# Altium PCB Teensy4-CANTool-Rev3.PcbDoc
Units mil, origin at the board's own origin, x right, y up, seen from the top; angles counter-clockwise.
Board outline 1209.64 x 3442.04 mil, 2 copper layers (Top Layer, Bottom Layer); 29 components, 48 nets, 173 pads, 56 vias.
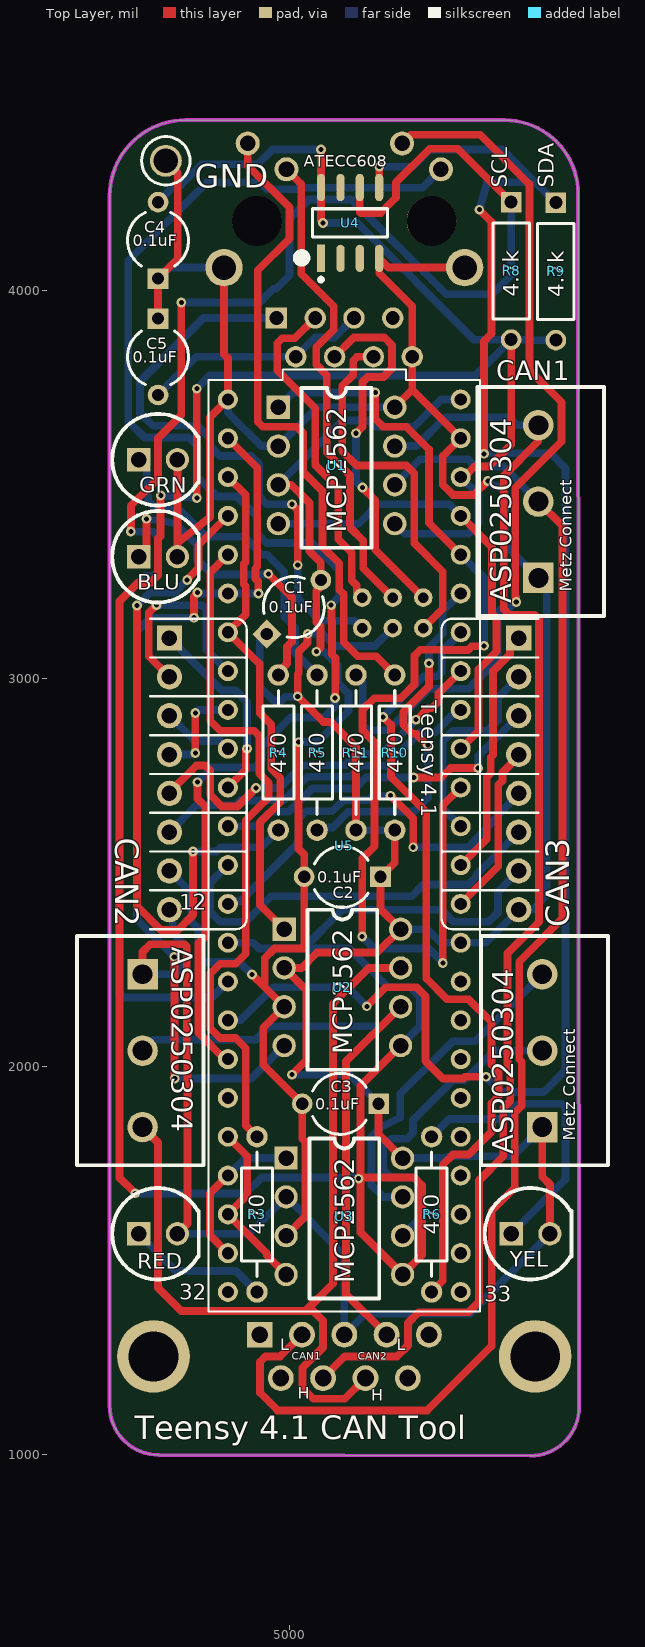
[diagram p0: Top Layer view]
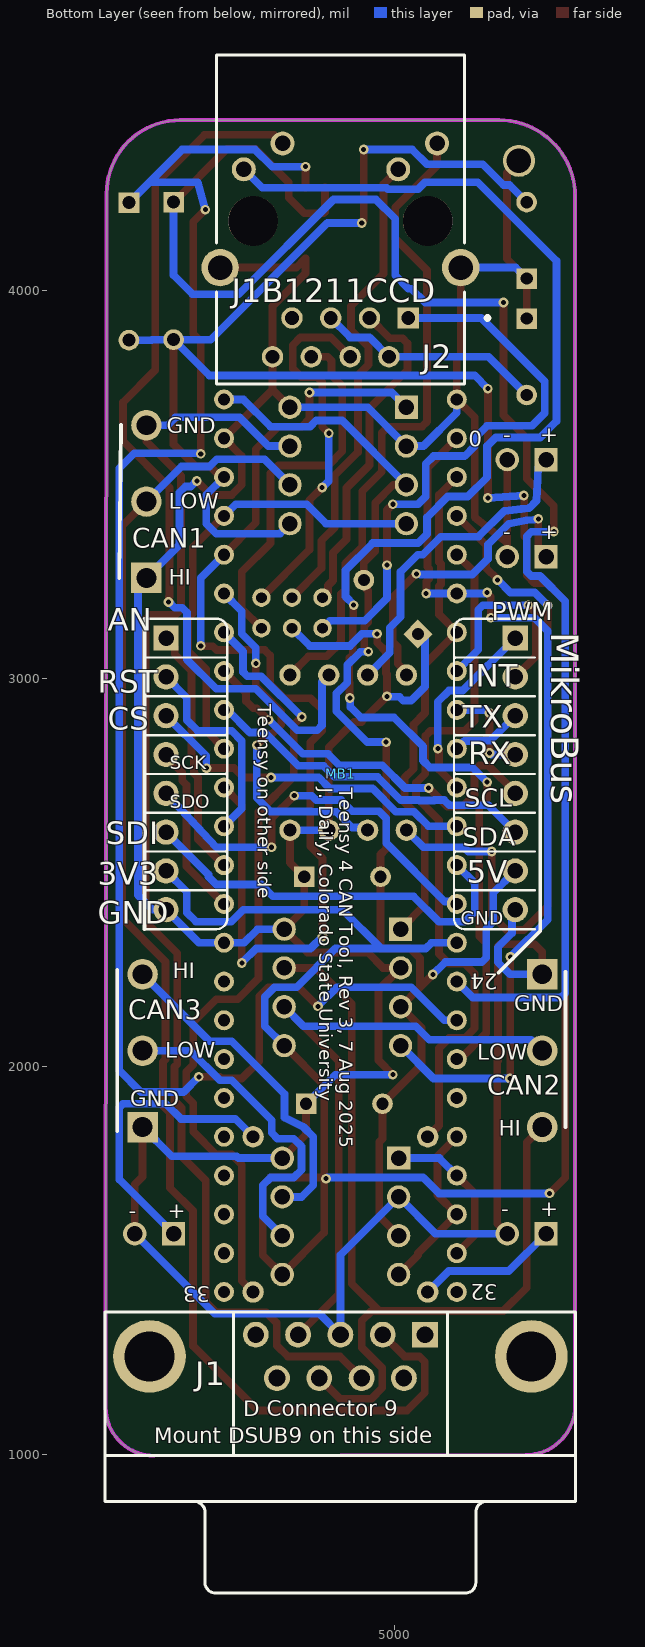
[diagram p1: Bottom Layer view, seen from below]

## Layer stack, top to bottom
Top Solder: solder mask 0.4, Solder Resist, Dk 3.5
Top Layer: signal copper 1.4
Dielectric 1: dielectric 12.6, FR-4, Dk 4.8
Bottom Layer: signal copper 1.4
Bottom Solder: solder mask 0.4, Solder Resist, Dk 3.5

## Board outline
4535.31,1126.44 ccw(c4661.88,1126.44) 4661.88,999.88 5620.25,997.96 ccw(c5620.25,1122.67) 5744.95,1122.67 5742.54,4250.4 ccw(c5553.15,4250.4) 5553.15,4439.79 4731.03,4440 ccw(c4731.03,4244.28) 4535.31,4244.28

## Design rules (kind name [scope] priority, off if disabled: settings)
Clearance [All] p1: gap=10 ignorepadtopadclearanceinfootprint=FALSE except(0: Arc-Hole Track-Hole SMDPad-Hole THPad-Hole Via-Hole Fill-Hole Poly-Hole Region-Hole Text-Hole)
PolygonConnect [All] p1: connectstyle=Relief reliefconductorwidth=10 reliefentries=4 polygonreliefangle="90 Angle" airgapwidth=10
RoutingVias [All] p1: holewidth=13 width=25 viastyle="Through Hole" minholewidth=13 minwidth=20 maxholewidth=28 maxwidth=50
SolderMaskExpansion [All] p1: expansion=4 istentingtop=FALSE
SupplyNets "Schematic Supply Nets_41" [InNet('ETH RX-')] p1: voltage=0.000
SupplyNets "Schematic Supply Nets_40" [InNet('ETH TX-')] p2: voltage=0.000
SupplyNets "Schematic Supply Nets_39" [InNet('ETH GREEN')] p3: voltage=0.000
SupplyNets "Schematic Supply Nets_38" [InNet('ETH TX+')] p4: voltage=0.000
SupplyNets "Schematic Supply Nets_37" [InNet('ETH YELLOW')] p5: voltage=0.000
SupplyNets "Schematic Supply Nets_36" [InNet('ETH RX+')] p6: voltage=0.000
SupplyNets "Schematic Supply Nets_34" [InNet('INT')] p7: voltage=0.000
SupplyNets "Schematic Supply Nets_33" [InNet('CS')] p8: voltage=0.000
SupplyNets "Schematic Supply Nets_32" [InNet('SCL')] p9: voltage=0.000
SupplyNets "Schematic Supply Nets_31" [InNet('CANTX2')] p10: voltage=0.000
SupplyNets "Schematic Supply Nets_30" [InNet('3V3')] p11: voltage=0.000
SupplyNets "Schematic Supply Nets_29" [InNet('PWM')] p12: voltage=0.000
SupplyNets "Schematic Supply Nets_28" [InNet('CANRX3')] p13: voltage=0.000
SupplyNets "Schematic Supply Nets_27" [InNet('MISO')] p14: voltage=0.000
SupplyNets "Schematic Supply Nets_26" [InNet('CANH1')] p15: voltage=0.000
SupplyNets "Schematic Supply Nets_25" [InNet('RST')] p16: voltage=0.000
SupplyNets "Schematic Supply Nets_24" [InNet('SCL2')] p17: voltage=0.000
SupplyNets "Schematic Supply Nets_23" [InNet('RX8')] p18: voltage=0.000
SupplyNets "Schematic Supply Nets_22" [InNet('GND')] p19: voltage=0.000
SupplyNets "Schematic Supply Nets_21" [InNet('RX2')] p20: voltage=0.000
SupplyNets "Schematic Supply Nets_20" [InNet('CANTX1')] p21: voltage=0.000
SupplyNets "Schematic Supply Nets_19" [InNet('5V')] p22: voltage=0.000
SupplyNets "Schematic Supply Nets_18" [InNet('CANH3')] p23: voltage=0.000
SupplyNets "Schematic Supply Nets_17" [InNet('Green')] p24: voltage=0.000
SupplyNets "Schematic Supply Nets_16" [InNet('CANRX2')] p25: voltage=0.000
SupplyNets "Schematic Supply Nets_15" [InNet('Blue')] p26: voltage=0.000
SupplyNets "Schematic Supply Nets_14" [InNet('TX2')] p27: voltage=0.000
SupplyNets "Schematic Supply Nets_13" [InNet('SDA')] p28: voltage=0.000
SupplyNets "Schematic Supply Nets_12" [InNet('SCK')] p29: voltage=0.000
SupplyNets "Schematic Supply Nets_11" [InNet('TX8')] p30: voltage=0.000
SupplyNets "Schematic Supply Nets_10" [InNet('CANL3')] p31: voltage=0.000
SupplyNets "Schematic Supply Nets_9" [InNet('MOSI')] p32: voltage=0.000
SupplyNets "Schematic Supply Nets_8" [InNet('CANRX1')] p33: voltage=0.000
SupplyNets "Schematic Supply Nets_7" [InNet('CANH2')] p34: voltage=0.000
SupplyNets "Schematic Supply Nets_6" [InNet('CANL2')] p35: voltage=0.000
SupplyNets "Schematic Supply Nets_5" [InNet('SDA2')] p36: voltage=0.000
SupplyNets "Schematic Supply Nets_4" [InNet('CANL1')] p37: voltage=0.000
SupplyNets "Schematic Supply Nets_3" [InNet('Yellow')] p38: voltage=0.000
SupplyNets "Schematic Supply Nets_2" [InNet('CANTX3')] p39: voltage=0.000
SupplyNets "Schematic Supply Nets_1" [InNet('Red')] p40: voltage=0.000
SupplyNets "Schematic Supply Nets" [InNet('AN')] p41: voltage=0.000
Width [All] p1: maxlimit=50 minlimit=10 preferedwidth=20 minimp=50.000000 maximp=50.000000 favimp=50.000000
30 further rules are at their usual default settings.

## Components (designator, comment, footprint, x,y, rotation, side; value= is the part's Value field where it differs from the comment)
BLU "LED" "LED - 5mm Through Hole" 4610,3315 r180 top
C1 "0.1uF" CAPR5-4X5 5010,3185 r45 top
C2 "0.1uF" CAPR5-4X5 5135,2490 r180 top
C3 "0.1uF" CAPR5-4X5 5130,1905 r180 top
C4 "0.1uF" CAPR5-4X5 4660,4130 r90 top
C5 "0.1uF" CAPR5-4X5 4660,3830 r270 top
CAN1 "Header 3" "PCB TERMINAL BLOCK - 3" 5640,3260 r90 top
CAN2 "Header 3" "PCB TERMINAL BLOCK - 3" 4620,2238.7 r270 top
CAN3 "Header 3" "PCB Terminal Block - 3" 5650,1845 r90 top
GND "5010" KSTN-5010_V 4680,4335 r90 top
GRN "LED" "LED - 5mm Through Hole" 4610,3565 r180 top
J1 "D Connector 9" DSUB1.385-2H9 5140,880 r0 bottom
J2 "J1B1211CCD" FP-J1B1211CCD-MFG 5140,4183.94 r0 bottom locked
MB1 "mikroBUS" "mikroBUS - Midi" 5639.46,2255 r180 bottom locked
R3 "470" AXIAL-0.4 4915,1620 r90 top
R4 "470" AXIAL-0.4 4970,2810 r270 top
R5 "470" AXIAL-0.4 5070,2810 r270 top
R6 "470" AXIAL-0.4 5365,1620 r270 top
R8 "4.7k" RESA60-630X240 5570,4051.18 r270 top
R9 "4.7k" RESA60-630X240 5685,4050 r270 top
R10 "470" AXIAL-0.4 5270,2810 r90 top
R11 "470" axial-0.4 5170,2810 r90 top
RED "LED" "LED - 5mm Through Hole" 4610,1570 r180 top
U1 "MCP2562" DIP8 4970,3700 r0 top
U2 "MCP2562" DIP8 4985,2355 r0 top
U3 "MCP2562" DIP8 4990,1765 r0 top
U4 "ATECC608" FP-C04-057-SWB-IPC_C 5155,4175 r90 top
U5 "TEENSY41" MODULE_DEV-16771 5140,2570 r270 top locked
YEL "LED" "LED - 5mm Through Hole" 5570,1570 r180 top

## Footprints (in the part's own frame and the unit in brackets; to place one, negate y for a bottom-side part, rotate by r counter-clockwise, add the part's x,y. Pads: shape width x height; smd on the part's side, far side on the other; paste and mask are expansions set on the pad)
AXIAL-0.4 [mm] "Axial Device, Thru-Hole; 2 Leads; 0.4 in Pin Spacing"
  round 1.4 hole 0.85: 1(-5.08,0) 2(5.08,0)
  silkscreen extent -4.06,-1.02 4.06,1.02
axial-0.4 [mm] "Axial Device, Thru-Hole; 2 Leads; 0.4 in Pin Spacing"
  round 1.4 hole 0.85: 1(-5.08,0) 2(5.08,0)
  silkscreen extent -4.06,-1.02 4.06,1.02
CAPR5-4X5 [mm] "Capacitor; 2 Leads"
  rect 1.35x1.35 hole 0.8: 1(-2.5,0)
  round 1.35 hole 0.8: 2(2.5,0)
  silkscreen extent -1.69,-2 1.82,2
DIP8 [mil]
  rect 60x60 hole 40: 1(0,0)
  round 60 hole 40: 2(0,-100) 3(0,-200) 4(0,-300) 5(300,-300) 6(300,-200) 7(300,-100) 8(300,0)
  silkscreen extent 60,-362 240,50
DSUB1.385-2H9 [mm] "Connector; D Subminiature; 9 Position; Right Angle; Pitch 1.385 mm"
  rect 1.69x1.69 hole 1.09: 1(-5.54,-10.92)
  round 1.69 hole 1.09: 2(-2.77,-10.92) 3(0,-10.92) 4(2.77,-10.92) 5(5.54,-10.92) 6(-4.155,-8.08) 7(-1.385,-8.08) 8(1.385,-8.08) 9(4.155,-8.08)
  round 4.76 hole 3.26: 10(-12.495,-9.5) 11(12.495,-9.5)
  silkscreen extent -15.4,-12.4 15.4,6
FP-C04-057-SWB-IPC_C [mil]
  rect 69.96x21.34 smd paste+0 mask+0: 1(-91.24,75)
  rrect100% 69.96x21.34 smd paste+0 mask+0: 2(-91.24,25) 3(-91.24,-25) 4(-91.24,-75) 5(91.24,-75) 6(91.24,-25) 7(91.24,25) 8(91.24,75)
  silkscreen extent -151,-96 37,96, body extent -118,-96 118,96, height 69
FP-J1B1211CCD-MFG [mm]
  rect 1.4x1.4 hole 0.9 paste-2539.97 mask+0: 1(-4.445,6.45)
  round 1.4 hole 0.9 paste-2539.97 mask+0: 2(-3.175,8.99) 3(-1.905,6.45) 4(-0.635,8.99) 5(0.635,6.45) 6(1.905,8.99) 7(3.175,6.45) 8(4.445,8.99)
  round 1.57 hole 1.02 paste-2539.97 mask+0: 9(-6.325,-4.98) 10(-3.785,-3.28) 11(3.785,-4.98) 12(6.325,-3.28)
  round 2.45 hole 1.6 paste-2539.97 mask+0: 13(-7.875,3.15) 14(7.875,3.15)
  round 3.25 hole 3.25 unplated paste-2539.97 mask+0: ""(-5.715,0.1) ""(5.715,0.1)
  silkscreen extent -9.75,-10.78 8.13,10.78, body extent -9.93,-10.65 9.93,10.65, height 15.53
KSTN-5010_V [mm] "Test Point, Dia 3.17mm"
  round 2.1 hole 1.6: 1(0,0)
  silkscreen extent -1.58,-1.59 1.58,1.59, body extent -1.59,-1.59 1.59,1.59, height 8.13
"LED - 5mm Through Hole" [mil] "Vishay TLCS510 Ultrabright LED, Ø 5 mm Untinted Non-Diffused Package"
  rect 60x60 hole 40: 1(0,0)
  round 60 hole 40: 2(-100,0)
  silkscreen extent -155,-118 68,118
"mikroBUS - Midi" [mil]
  rect 65x65 hole 40: 1(50,850) 16(950,850)
  round 65 hole 40: 2(50,750) 3(50,650) 4(50,550) 5(50,450) 6(50,350) 7(50,250) 8(50,150) 9(950,150) 10(950,250) 11(950,350) 12(950,450) 13(950,550) 14(950,650) 15(950,750)
  silkscreen extent 0,100 1000,900, body extent -5,100 1010,900, height 82
MODULE_DEV-16771 [mm]
  round 1.308 hole 0.8: 0(-26.67,-7.62) 1(-24.13,-7.62) 2(-21.59,-7.62) 3(-19.05,-7.62) 3.3V_1(6.35,-7.62) 3.3V_2(-24.13,7.62) 4(-16.51,-7.62) 5(-13.97,-7.62) 6(-11.43,-7.62) 7(-8.89,-7.62) 8(-6.35,-7.62) 9(-3.81,-7.62) 10(-1.27,-7.62) 11(1.27,-7.62) 12(3.81,-7.62) 13(3.81,7.62) 14(1.27,7.62) 15(-1.27,7.62) 16(-3.81,7.62) 17(-6.35,7.62) 18(-8.89,7.62) 19(-11.43,7.62) 20(-13.97,7.62) 21(-16.51,7.62) 22(-19.05,7.62) 23(-21.59,7.62) 24(8.89,-7.62) 25(11.43,-7.62) 26(13.97,-7.62) 27(16.51,-7.62) 28(19.05,-7.62) 29(21.59,-7.62) 30(24.13,-7.62) 31(26.67,-7.62) 32(29.21,-7.62) 33(29.21,7.62) 34(26.67,7.62) 35(24.13,7.62) 36(21.59,7.62) 37(19.05,7.62) 38(16.51,7.62) 39(13.97,7.62) 40(11.43,7.62) 41(8.89,7.62) GND1(-29.21,-7.62) GND2(6.35,7.62) GND3(-26.67,7.62) VIN(-29.21,7.62)
  round 1.208 hole 0.7: GND5(-14.24,3.17) LED(-16.24,3.17) R+(-16.24,5.17) R-(-14.24,5.17) T+(-14.24,1.17) T-(-16.24,1.17)
  silkscreen extent -31.18,-9.5 30.48,8.89
"PCB TERMINAL BLOCK - 3" [mm] "3 Position Wire to Board Terminal Block Horizontal with Board 0.197\" (5.00mm) Through Hole"
  rect 2x2 hole 1.3: 1(0,0)
  round 2 hole 1.3: 2(5,0) 3(10,0)
  silkscreen extent -2.5,-4.3 12.5,4
"PCB Terminal Block - 3" [mm] "3 Position Wire to Board Terminal Block Horizontal with Board 0.197\" (5.00mm) Through Hole"
  rect 2x2 hole 1.3: 1(0,0)
  round 2 hole 1.3: 2(5,0) 3(10,0)
  silkscreen extent -2.5,-4.3 12.5,4
RESA60-630X240 [mm] "Axial Resistor, 2-Leads, Dia 2.4mm, Body Length 6.3mm"
  rect 1.35x1.35 hole 0.85: 1(-4.5,0)
  round 1.35 hole 0.85: 2(4.5,0)
  silkscreen extent -3.15,-1.2 3.15,1.2, body extent -3.15,-1.2 3.15,1.2, height 2.4

## Part data
BLU: "Blue 470nm LED Indication - Discrete 3.2V Radial", Manufacturer="Würth Elektronik", PartNumber=151051BS04000, Supplier Part Number 1=732-5015-ND, Supplier 1=Digi-Key
C1 C2 C3 C4 C5: library part Cap, "0.1µF ±10% 50V Ceramic Capacitor X7R 0603 (1608 Metric)", Manufacturer="Vishay Beyschlag/Draloric/BC Components", PartNumber=K104K15X7RF53H5, Supplier Part Number 1=BC3323-ND, Supplier 1=Digi-Key
CAN1 CAN2 CAN3: "Header, 3-Pin", Manufacturer="Phoenix Contact", PartNumber=1935174, Supplier Part Number 1=277-1578-ND, Supplier 1=Digi-Key
GND: library part CMP-002-00086-1, "Interconnection Device", Connector Type="Interconnection Device", RoHS Compliant=Yes
GRN: "Green 572nm LED Indication - Discrete 2.1V Radial", Manufacturer="Würth Elektronik", PartNumber=151051VS04000, Supplier Part Number 1=732-5017-ND, Supplier 1=Digi-Key
J1: "CONN D-SUB PLUG 9POS R/A SLDR", Manufacturer="Assmann WSW Components", PartNumber="A-DS 09 A/KG-T2S", Supplier Part Number 1=AE10968-ND, Supplier 1=Digi-Key
J2: library part CMP-240752-000001-1, "CONN JACK 1PORT 100 BASE-T PCB", Color=Green, Max Operating Temperature=85°C, Min Operating Temperature=-40°C, Connector Type=RJ45, Contact Material=Brass, Contact Plating=Gold, Direction=Down, Housing Material=Thermoplastic, Mount="Through Hole", Number of Cores per Jack=4, Number of Ports=1, Number of Rows=1, Packaging=Bulk, Series=-, Shielding=Shielded, Termination=Solder
MB1: library part "mikroBUS compatible add-on board", "mikroBUS compatible add-on board"
R3 R4 R5 R6 R10 R11: library part Res1, "470 Ohms ±5% 0.25W, 1/4W Through Hole Resistor Axial Carbon Film", Manufacturer=YAGEO, PartNumber=CFR-25JB-52-470R, Supplier Part Number 1=470QBK-ND, Supplier 1=Digi-Key
R8 R9: library part CMP-1659-00063-1, "Axial Resistor, 47.5 KOhm, +/- 1%, 0.25 W, -55 to 155 degC, 2-Pin THD, RoHS, Bulk", Case Code (Metric)=2520, Case\Package=1008, Current Rating="1.3 A", Max Operating Temperature="125 degC", Min Operating Temperature="-55 degC", Package Quantity=3000, Tolerance=20%, ComponentLink1Description="Manufacturer URL", ComponentLink1URL=http://www.yageo.com/, ComponentLink2Description=Datasheet, ComponentLink2URL=http://www.yageo.com/documents/recent/Yageo%20LR_MFR_2013.pdf, DatasheetVersion=Apr-13, Height="1.2 mm", Length="2.5 mm", Mount="Surface Mount", PackageDescription="2-Pin Axial Lead, Dia 2.4 mm, Body Length 6.3 mm", PackageReference=MFR-25, Packaging="Tape and Reel", Radiation Hardening=No, RoHSCompliant=true, Shielding=Shielded, Width="2 mm"
RED: "Red 645nm LED Indication - Discrete 2.1V Radial", Manufacturer="Würth Elektronik", PartNumber=151051RS11000, Supplier Part Number 1=732-5016-ND, Supplier 1=Digi-Key
U1 U2 U3: library part MCP2551, "1/1 Transceiver CANbus 8-PDIP", Manufacturer="Microchip Technology", PartNumber=MCP2562FD-E/P, Supplier Part Number 1=MCP2562FD-E/P-ND, Supplier 1=Digi-Key
U4: library part CMP-06279-000039-1, "IC AUTHENTICATION CHIP"
U5: library part CMP-105-000000-6, "PJRC Teensy 4.1 Development Board", Design Item ID="Teensy 4.1"
YEL: "Yellow 590nm LED Indication - Discrete 2V Radial", Manufacturer="Würth Elektronik", PartNumber=151051YS04000, Supplier Part Number 1=732-5018-ND, Supplier 1=Digi-Key

## Via types
v1: diameter 25, hole 13, Top Layer to Bottom Layer, 56 vias

## Nets (pads, with @x,y where several pads share a name; then routed paths per layer and width w, separated by ;. In a path a pad name is that pad's centre, name@x,y a point inside that pad or via, vN(x,y) a via of type N, cw(c..) or ccw(c..) an arc to the next point about the centre after c; other vN are vias at no path point)
3V3: C4.2 MB1.7 R8.2 R9.2 U1.5 U2.5 U3.5 U4.8 U5.3.3V_1 U5.3.3V_2 | length 8407.2
  Top Layer w20: v1(4601,1674) 4560.63,1714.37 4560.63,3200 4607.63,3247 4640,3247 4660,3267 4660,3361.48 4666.27,3367.74 4666.27,3471.59 v1(4667.18,3472.5) ; v1(4760,3466.33) v1(4760,3748) ; v1(5080,4364) 5080,4181.35 5085,4176.35 v1(5085,4175) ; v1(5177,1712) 5180,1715 v1@5181.57,1715 ; U2.5 5181.57,1951.57 v1@5181.57,1715 ; U5.3.3V_2 5448.52,3520 5476.02,3547.5 5513.46,3547.5 5570,3604.04 R8.2 ; v1@5181.57,1715 5320,1715 5340,1695 5340,1515 U3.5 5181.57,1573.43 v1@5181.57,1715
  Bottom Layer w20: v1(4601,1674) 4886,1674 4927,1715 5174,1715 v1(5177,1712) ; C4.2 4704.57,4273 4720,4273 4773,4326 4917,4326 4955,4364 v1(5080,4364) ; v1(4667.18,3472.5) v1(4760,3466.33) ; v1(4760,3748) 4794,3782 5477.98,3782 R8.2 ; U5.3.3V_1 4905,2320 4920,2305 5035,2305 ; v1(5085,4175) 5173.2,4175 5474.18,3874.02 R8.2 ; U1.5 5296,3374 5460,3374 5486,3400 5486,3474 U5.3.3V_2 ; U2.5 5335,2105 5335,2180 5310,2205 5253,2205 5153,2305 5035,2305 ; MB1.7 5536,2451.54 5536,2398 5512,2374 5421.3,2374 5390.3,2405 5135,2405 5035,2305 ; R9.2 5627.18,3872.83 5626,3874.02 R8.2
5V: C1.2 C2.2 C3.2 MB1.10 U1.3 U2.3 U3.3 U5.VIN | length 3374.5
  Top Layer w20: v1(4902,2238) 4935,2205 ; U1.3 5003.55,3500 5050.3,3453.26 5050.3,3329.3 5079.6,3300 C1.2 5073.26,3248.26 5073.26,3231.56 5068,3226.31 5068,3146.23 5078.5,3135.73 5078.5,3080.5 v1(5068,3070) ; U3.3 5040,1615 5040,1806.57 5031.57,1815 C3.2 4931,2005.57 4931,2101 U2.3 4935,2205 ; v1(5022,2837) 5022,2562 5036.57,2547.43 C2.2 5036.57,2305 4960,2305 4935,2280 4935,2205
  Bottom Layer w20: MB1.10 4746,2448.46 4746,2374.21 4764.25,2355.96 4764.25,2281.72 4775.97,2270 4870,2270 v1(4902,2238) ; U1.3 5136.08,3666.08 5202.27,3666.08 5218.35,3650 5320,3650 5390,3720 U5.VIN ; v1(5022,2837) 5071,2837 5150.5,2916.5 5150.5,2962.24 5122.44,2990.3 5122.44,3035.56 5088,3070 v1(5068,3070)
AN: MB1.1 U5.14 | length 646.9
  Top Layer w20: U5.14 5506.96,2586.96 5506.96,2746 5517.5,2756.54 5517.5,2798.04 5523.5,2804.04 5523.5,3020.11 5566.96,3063.57 5566.96,3082.5 MB1.1
Blue: R4.2 U5.2 | length 1731.7
  Top Layer w20: v1(4606,3189) 4606,2414.21 4667.71,2352.5 4711.21,2352.5 4750,2391.29 v1(4750,2555) ; v1(4735,3255) 4735,3256.35 4764,3285.35 4764,3344 U5.2
  Bottom Layer w20: v1(4606,3189) 4639.5,3222.5 4702.5,3222.5 v1(4735,3255) ; v1(4750,2555) 4810.3,2555 4821.05,2565.75 4925.75,2565.75 R4.2
CANH1: CAN1.3 J1.7 U1.7 | length 3367.6
  Top Layer w20: J1.7 5141.36,1254 5276,1254 5304,1282 5304,1340 5332,1368 5460,1368 5487,1395 5487,1707.15 5549.5,1769.65 5549.5,1893.95 5567.5,1911.95 5567.5,2000.23 5560.63,2007.1 5560.63,2292.63 5642,2374 5642,3153.5 5630,3165.5 5565.13,3165.5 5550.63,3180 5550.63,3522.9 5640,3612.27 CAN1.3
  Bottom Layer w20: U1.7 5326,3600 5400,3674 5564.7,3674 5585,3653.7 CAN1.3
CANH2: CAN2.3 J1.8 U2.7 | length 2315.5
  Top Layer w20: CAN2.3 4660,1805 4660,1431 4720,1371 5040,1371 ; J1.8 5141.26,1144.84 5060,1144.84 5032,1172.84 5032,1224 5085,1277 5085,1346 5060,1371 5040,1371 ; U2.7 5203.15,2255 5110.58,2162.43 5110.58,1441.58 5040,1371
CANH3: CAN3.3 U3.7 | length 862.2
  Bottom Layer w20: U3.7 5240,1665 5210,1695 5210,1820 5235,1845 5284.4,1869.4 5284.4,1930.4 5420,2066 5477.3,2066 CAN3.3
CANL1: CAN1.2 J1.2 U1.6 | length 3626.7
  Top Layer w20: J1.2 4975.02,1254 4937,1254 4923,1240 4923,1160 4968.16,1114.84 5353.84,1114.84 5520,1281 5520,1629 5579.5,1688.5 5579.5,1881.52 5597.5,1899.53 5597.5,2012.66 5590.63,2019.53 5590.63,2271.03 5702.34,2382.74 5702.34,3394.51 CAN1.2
  Bottom Layer w20: U1.6 5335.75,3565.75 5458.95,3565.75 5477.2,3547.5 5549.35,3547.5 CAN1.2
CANL2: CAN2.2 J1.4 U2.6 | length 1658.5
  Top Layer w20: J1.4 5144.5,1414.48 5144.5,2014.5 U2.6
  Bottom Layer w20: CAN2.2 4648.15,2070 4911,2070 4946,2105 5235,2105 U2.6
CANL3: CAN3.2 U3.6 | length 858.7
  Bottom Layer w20: U3.6 5340,1615 5340,1695 5320,1715 5260,1715 5240,1735 5240,1795 5260,1815 5302,1815 5317,1830 5317,1862.75 5420,1965.75 5450.45,1965.75 5526.55,2041.85 CAN3.2
CANRX1: U1.4 U5.17 U5.23 | length 1179.8
  Top Layer w20: U5.17 5486,2866 5486,3025.04 5532.5,3071.54 5532.5,3155.7 5520.63,3167.57 5520.63,3339.37 U5.23
  Bottom Layer w20: U1.4 5177,3400 5227,3450 5410,3450 U5.23
CANRX2: U2.4 U5.0 U5.4 | length 2335.3
  Top Layer w20: v1(4701.75,2283.5) 4702.38,2282.88 4702.38,1970.62 v1(4703,1970) ; v1(4752.5,3157.5) 4752.5,3211.89 4761.75,3221.15 v1(4761.75,3222.5) ; U5.0 4915.75,3544.25 4915.75,3288.62 4910.92,3283.8 4910.92,3258.12 4918.04,3250.99 4918.04,3220.96 v1(4919,3220)
  Bottom Layer w20: v1(4701.75,2283.5) 4606,2379.25 4606,3123.5 4640,3157.5 v1(4752.5,3157.5) ; v1(4703,1970) 4900,1970 U2.4 ; v1(4761.75,3222.5) 4763.1,3222.5 4765.6,3220 v1(4919,3220)
CANRX3: U3.4 U5.28 U5.30 | length 458.6
  Top Layer w20: U5.28 4890,1770 4890,1670 U5.30 4940,1520 4940,1515 U3.4
CANTX1: U1.1 U5.16 U5.22 | length 2812.5
  Top Layer w20: v1(5186,2336) 5186,2537 5218,2569 5218,2836 5187,2867 5187,2920 5217,2950 5285.27,2950 5321,2985.73 5321,3060 5336,3075 5394,3075 5394.75,3074.25 5458.95,3074.25 5468.74,3084.04 5499.04,3084.04 v1(5500,3085) ; v1(5219.71,3738) 5219.71,3670.29 5240,3650 5300,3650 5358,3592 5358,3402 U5.22 ; v1(5394,2268) 5394,2674 U5.16
  Bottom Layer w20: U1.1 5008,3738 v1(5219.71,3738) ; v1(5186,2336) 5217,2305 5357,2305 v1(5394,2268) ; U5.22 5500,3260 v1(5500,3085)
CANTX2: U2.1 U5.1 U5.5 | length 1310.5
  Top Layer w20: U5.1 4885.75,3474.25 4885.75,3301.05 4880.92,3296.22 4880.92,3243.78 4885.75,3238.95 4885.75,3165.75 U5.5 4922,3038 4922,2912 4951.5,2882.5 4951.5,2768.35 4975.03,2744.83 4975.03,2682.28 4922.44,2629.7 4922.44,2417.56 U2.1
CANTX3: U3.1 U5.29 U5.31 | length 406.7
  Top Layer w20: U5.31 4794,1566 4794,1674 U5.29
  Bottom Layer w20: U5.29 4885,1765 U3.1
CS: MB1.3 U5.10 | length 885.4
  Top Layer w20: v1(5319,2746) 5390,2746 5414,2770 v1(5485,2770)
  Bottom Layer w20: U5.10 4912.74,2620 4950.3,2657.56 4997.13,2657.56 5057.13,2717.56 5167.87,2717.56 5196.31,2746 v1(5319,2746) ; v1(5485,2770) 5485.96,2770.96 5485.96,2801.5 MB1.3
"ETH GREEN": J2.10 U5.LED | length 1254.9
  Top Layer w20: J2.10 5029,4275.05 5029,4044 5113,3960 5113,3900 5067.44,3854.44 5067.44,3810 5095,3782.44 5095,3584 5154.5,3524.5 5154.5,3390 5189,3355.5 5189,3285.17 U5.LED
"ETH RX+": J2.4 U5.R+ | length 962
  Top Layer w20: J2.4 5165,3880 5243,3880 5263,3860 5263,3800 5241,3778 5200,3778 5187,3765 5187,3650 v1(5170,3633) ; v1(5187,3493) 5220,3460 5220,3332.91 U5.R+
  Bottom Layer w20: v1(5170,3633) 5170,3510 v1(5187,3493)
"ETH RX-": J2.6 U5.R- | length 960.3
  Top Layer w20: J2.6 5173,3830 5163,3820 5163,3783 5135,3755 5135,3587 5172,3550 5300,3550 5320,3530 5320,3350 5394,3276 5394,3181.09 U5.R-
"ETH TX+": J2.1 U5.T+ | length 1497.1
  Top Layer w20: v1(5005,3450) 5020,3435 v1(5020,3293)
  Bottom Layer w20: J2.1 4777,3930 4613.42,3766.42 4613.42,3685 4646.42,3652 4762,3652 4794,3620 4794,3600 4820,3574 4900,3574 4920,3554 4920,3470 4940,3450 v1(5005,3450) ; v1(5020,3293) 5020,3207.72 5077.72,3150 5166.69,3150 U5.T+
"ETH TX-": J2.3 U5.T- | length 870.7
  Top Layer w20: J2.3 5012.56,3877.56 4980,3877.56 4967.44,3865 4967.44,3795 5065,3697.44 5065,3551.14 5124.28,3491.87 5124.28,3360 5159,3325.28 5159,3253.48 5171.95,3240.53 5171.95,3223.48 U5.T-
"ETH YELLOW": J2.12 U5.26 | length 3694.4
  Top Layer w20: v1(4761.75,2733.75) 4761.75,2691.12 4782.5,2670.38 4782.5,2337.14 4764.25,2318.89 4764.25,2087.57 4831.83,2020 U5.26 ; v1(5106,3190) 5106.96,3189.04 5106.96,3149.7 5108.5,3148.15 5108.5,3062.5 5117.56,3053.44 5117.56,2990.3 5116.85,2989.59 5116.85,2951.85 v1(5115.89,2950.89)
  Bottom Layer w20: v1(4761.75,2733.75) 4799.37,2771.37 4908.94,2771.37 4927.35,2789.77 4927.35,2825.93 5002.14,2900.73 5087.86,2900.73 5114.93,2927.8 5114.93,2949.93 v1(5115.89,2950.89) ; v1(5106,3190) 5106,3191.35 5127,3212.35 5127,3280 5057.07,3349.93 4940,3349.93 4916.67,3373.26 4916.67,3416.79 4863.45,3470 4812,3470 4762,3520 4762,3600 4740,3622 4625,3622 4583.42,3663.58 4583.42,4077.42 4786,4280 4922,4280 4940,4262 5017.5,4262 5021,4265.5 5341.45,4265.5 J2.12
GND: BLU.2 C1.1 C2.1 C3.1 C4.1 C5.1 CAN1.1 CAN2.1 CAN3.1 GND.1 GRN.2 J1.3 J2.8 J2.13 J2.14 MB1.8 MB1.9 R10.1 R11.1 RED.2 U1.2 U1.8 U2.2 U2.8 U3.2 U3.8 U4.4 U5.GND1 U5.GND2 U5.GND3 U5.GND5 YEL.2 | length 10737.7
  Top Layer w20: CAN2.1 4620,2296 4640,2316 4729,2316 4734.25,2310.75 4734.25,2016 4736,2014.25 4736,1596 RED.2 ; C5.1 C4.1 4711,4082.57 4711,4304 GND.1 ; BLU.2 4710,3350 ; GRN.2 4710,3350 ; J2.13 4829.96,3836.63 4840,3826.59 U5.GND1 4794,3674 4794,3416.43 4710,3350 ; v1(5005,1980) 5042,2017 5042,2198 U2.2 5030,2255 5070,2295 5225,2295 U2.8 5233.43,2406.57 C2.1 5270,2526.57 R10.1 ; v1(5046,3116) 5045.04,3115.04 5045.04,3093.01 5022.44,3070.4 5022.44,3014.6 5020,3012.16 v1(5020,2955) 5085.98,2889.02 5104.98,2889.02 5170,2824 R11.1 ; C3.1 5228.43,1826.57 U3.8 ; U1.8 5315,3745 ; J2.14 5253.84,4059.92 U4.4 5230,4045 5315,3960 J2.8 5315,3745 ; v1(5510,3510) 5474,3474 5420,3474 5394,3500 5394,3574 U5.GND3 5315,3745 ; CAN3.1 5650,1717 5670,1697 YEL.2
  Bottom Layer w20: CAN2.1 4702.91,2238.7 4734.25,2270.04 4734.25,2308.03 4698.07,2344.21 4698.07,2396.39 MB1.9 ; C4.1 4688.35,4059.92 J2.13 ; RED.2 4895,1570 U3.2 5140,1515 J1.3 5194.08,1364 5464,1364 YEL.2 ; U5.GND1 4840,3686 4926,3600 U1.2 5070,3700 U1.8 ; C1.1 4922,3115.4 4922,2980 4958,2944 4978,2944 4988.04,2954.04 5019.04,2954.04 v1(5020,2955) ; v1(5005,1980) 5153.43,1980 C3.1 ; v1(5046,3116) 5084.43,3116 5115.43,3085 5219.17,3085 U5.GND5 ; R11.1 R10.1 ; U2.8 5353.5,2355 5388.5,2320 U5.GND2 5504.46,2320 MB1.8 5624,2405 5662,2443 5662,3238 CAN1.1 5555,3345 5555,3480 5539.48,3495.52 5525.83,3495.52 5511.35,3510 v1(5510,3510) ; U3.8 5403,1765 5408,1770 5575,1770 CAN3.1
Green: R5.2 U5.21 | length 939.9
  Top Layer w20: v1(5355.5,2829) 5354.15,2829 5324.91,2858.24 5315.8,2858.24 5292.5,2881.54 5292.5,2914.8 5358,2980.3 v1(5358,3040)
  Bottom Layer w20: R5.2 5076.72,2616.72 5109.46,2616.72 5150.3,2657.56 5214.84,2657.56 5215.28,2658 5320,2658 5355.5,2693.5 v1(5355.5,2829) ; v1(5358,3040) 5358,3080 5394,3116 5394,3174 U5.21
INT: MB1.15 U5.6 | length 530.3
  Top Layer w20: v1(4656,3190) 4636,3170 4636,3058.46 MB1.15
  Bottom Layer w20: v1(4656,3190) 4773.28,3190 4785,3178.28 4785,3075 U5.6
MISO: MB1.5 U5.12 | length 1061.1
  Top Layer w20: v1(5259,2699) 5317.56,2640.44 v1(5317.56,2566)
  Bottom Layer w20: U5.12 4846.03,2426.03 4871.03,2426.03 5022,2577 5022,2640 5040.76,2658.76 5109.08,2658.76 5137.87,2687.56 5202.41,2687.56 5213.85,2699 v1(5259,2699) ; v1(5317.56,2566) 5460,2566 MB1.5
MOSI: MB1.6 U5.11 | length 1044.2
  Bottom Layer w20: U5.11 4794,2474 4794,2400 4820,2374 4886,2374 4952,2440 5314,2440 5344,2470 5460,2470 5480,2490 5480,2495.54 MB1.6
NetBLU_1: BLU.1 R4.1 | length 798.1
  Top Layer w20: BLU.1 4630,3335 v1(4630,3412.5) ; v1(4944.38,3270.62) 5005,3210 5005,3095.39 4992.44,3082.83 4992.44,3039.27 4970,3016.83 R4.1
  Bottom Layer w20: v1(4630,3412.5) 4641.29,3410 4660.71,3408.72 4706,3400 4760,3346 4760,3309 4800,3269 4934,3269 4934.67,3269.67 4943.42,3269.67 v1(4944.38,3270.62)
NetC5_2: C5.2 J2.2 J2.5 | length 587.2
  Bottom Layer w20: C5.2 4758.43,3830 J2.2 5065,3880 5115,3880 J2.5
NetGRN_1: GRN.1 R5.1 | length 839.1
  Bottom Layer w20: GRN.1 4630,3545 4634.68,3459.04 4653.72,3440 4673.95,3437.91 4717.76,3432.74 4784.5,3366 4881.5,3366 4927.57,3319.93 4941.04,3319.93 4985,3275.96 4985,3160 5013,3132 5013,3067 R5.1
NetJ2_9: J2.9 R10.2 | length 1673.4
  Top Layer w20: J2.9 4890.98,4322.78 4998.98,4214.79 4998.98,4134.98 4917,4053 4917,3663 4930,3650 5017,3650 5033.55,3633.45 5033.55,3534.02 5083.87,3483.7 5083.87,3340.63 5127,3297.5 5127,3229.98 5138.5,3218.48 5138.5,3094.5 5175,3058 5222,3058 R10.2
NetJ2_11: J2.11 R11.2 | length 2297.6
  Top Layer w20: J2.11 5311.02,4402 5490,4402 5617,4275 5617,3796 5700,3713 5700,3612 5580.63,3492.63 5580.63,3212.35 5582.17,3210.8 5582.17,3198.96 v1(5583.13,3198)
  Bottom Layer w20: R11.2 5187.5,2992.5 5187.5,2880 5200,2867.5 5251.54,2867.5 5358.29,2974.25 5460,2974.25 5535.63,3049.88 5535.63,3171.25 5547.35,3182.97 5566.74,3182.97 5581.77,3198 v1(5583.13,3198)
NetR3_1: R3.1 RED.1 | length 367.1
  Bottom Layer w20: RED.1 4706,1474 4861,1474 R3.1
NetR6_1: R6.1 YEL.1 | length 767.3
  Bottom Layer w20: R6.1 5411,1866 5551,1866 5590,1905 5700,1905 5710,1895 5710,1710 YEL.1
PWM: MB1.16 U5.9 | length 508.8
  Top Layer w20: U5.9 4885.75,2765.75 4885.75,2816.75 v1(4889,2820)
  Bottom Layer w20: MB1.16 4824.46,2970 4860,2970 4889,2941 v1(4889,2820)
Red: R3.2 U5.3 | length 1792.3
  Top Layer w20: U5.3 4794.25,3274.25 4794.25,2891.75 4820,2866 4908,2866 4921.5,2852.5 4921.5,2755.93 4945.03,2732.4 4945.03,2694.71 4886,2635.69 4886,2291.75 4860,2265.75 4820,2265.75 4794.25,2240 4794.25,2100 4820,2074.25 4860,2074.25 4886,2048.25 4886,1849 R3.2
RST: MB1.2 U5.15 | length 536.6
  Bottom Layer w20: U5.15 5394,2666 5394,2840 5420,2866 5508.03,2866 5536,2893.97 5536,2951.54 MB1.2
RX2: MB1.13 U5.7 | length 258.6
  Top Layer w20: v1(4756,2808.86) v1(4756,2912)
  Bottom Layer w20: MB1.13 4750.78,2805 4754.65,2808.86 v1(4756,2808.86) ; v1(4756,2912) 4764,2920 U5.7
RX8: U5.34
SCK: MB1.4 U5.13 | length 446.9
  Top Layer w20: U5.13 5536.96,2516.96 5536.96,2726.75 5547.5,2737.29 5547.5,2758.57 5589.46,2800.53 MB1.4
SCL: MB1.12 U5.19 | length 1018.9
  Top Layer w20: MB1.12 4689.46,2707.42 4758.5,2776.46 4781.89,2776.46 4794.25,2764.09 4794.25,2701.05 4824.37,2670.94 4864.7,2670.94 v1(4912.53,2718.76) ; v1(5325,2895) 5326.35,2895 5355.59,2924.24 5364.94,2924.24 5383.01,2942.31 5383.01,2963.01 U5.19
  Bottom Layer w20: v1(4912.53,2718.76) 4973.48,2718.76 5032.28,2777.56 5143.02,2777.56 5172.34,2806.88 5236.88,2806.88 v1(5325,2895)
SCL2: R8.1 U4.6 U5.24 | length 4209.6
  Top Layer w20: v1(4590,3380) 4590,3446 4660,3516 4660,3620 4720,3680 v1(4720,3970) ; U4.6 5180,4203 5183,4200 5233,4200 5273,4240 5273,4279 5360,4366 5432.35,4366 R8.1
  Bottom Layer w20: v1(4590,3380) 4648.28,3378.72 4660,3367 4660,3276.72 4648.28,3265 4625.63,3265 4560.63,3200 4560.63,2190 4571.63,2179 4799,2179 U5.24 ; v1(4720,3970) 4921.6,3970 4957.08,4005.48 4964.48,4005.48 4999,4040 4999,4186 5048.5,4235.5 5158,4235.5 5402.5,3991 5521,3991 5570,4040 R8.1
SDA: MB1.11 U5.18 | length 882.1
  Bottom Layer w20: MB1.11 4758.71,2674.25 4858.95,2674.25 4872.26,2687.56 4897.77,2687.56 4899.06,2686.26 4936.58,2686.26 4937.87,2687.56 4984.71,2687.56 5044.71,2747.56 5155.45,2747.56 5183.89,2776 5248.43,2776 5333.93,2861.5 5373.07,2861.5 5431.57,2920 U5.18
SDA2: R9.1 U4.5 U5.25 | length 4392.1
  Top Layer w20: v1(5198.04,2155.96) 5247.07,2205 5326,2205 5349.08,2181.92 5349.08,2014.92 5394,1970 5446.65,1970 5451,1974.34 v1(5505,1974.34) ; U4.5 v1(5230,4320) ; v1(5488,4209) 5519,4178 5519,3889.18 5500,3870.18 v1(5500,3580)
  Bottom Layer w20: U5.25 4872.4,2120 4957.4,2205 5149,2205 v1(5198.04,2155.96) ; v1(5230,4320) 5316,4320 5360,4364 5548.17,4364 5632.17,4280 ; v1(5488,4209) 5508,4280 5632.17,4280 ; v1(5500,3580) 5500.96,3580.96 5504.49,3580.96 5504.95,3581.41 5671.59,3581.41 5710,3543 5710,1991 5654,1935 5544.34,1935 v1(5505,1974.34) ; R9.1 5632.17,4280
TX2: MB1.14 U5.8 | length 185.7
  Bottom Layer w20: MB1.14 4753.1,2841.36 4769.46,2841.36 4771.11,2839.72 4820.28,2839.72 U5.8
TX8: U5.35
Yellow: R6.2 U5.20 | length 2054.5
  Top Layer w20: v1(5239.5,2901.94) 5260,2881.44 5260,2748 5351,2657 5351,2228 5404.75,2174.25 5460,2174.25 5519.5,2114.75 5519.5,2005.81 5537.5,1987.8 5537.5,1924.38 5519.5,1906.38 5519.5,1833.5 5460,1774 5420,1774 5394,1748 5394,1449 R6.2
  Bottom Layer w20: v1(5239.5,2901.94) 5344.56,3007 5380,3007 5391,3018 5391,3070.57 5440,3119.57 U5.20
pads on no net: J1.1 J1.5 J1.6 J1.9 J1.10 J1.11 J2. J2.7 U4.1 U4.2 U4.3 U4.7 U5.27 U5.32 U5.33 U5.36 U5.37 U5.38 U5.39 U5.40 U5.41

## Keep-outs
Keep-Out Layer:
  the board outline again, w10

## Silkscreen, mask and mechanical layers (free items; w line width, h text height)
Top Overlay:
  circle w25: c5030,4085 r10
  text "SCL" at 5560,4265 h40 r90
  text "SDA" at 5680,4265 h40 r90
  text "L" at 4975,1270 h30
  text "L" at 5275,1270 h30
  text "CAN1" at 5005,1245 h20
  text "CAN2" at 5175,1245 h20
  text "H" at 5020,1145 h30
  text "H" at 5210,1140 h30
  text "Teensy 4.1 CAN Tool" at 4600,1039.99 h60
Bottom Overlay:
  lines w10: 4560,1845 4560,2245 ; 4625,3150 4625,2350 4732.5,2242.5 ; 5644.46,2355 5644.46,3155 ; 5705,3655 5710,3260 ; 5715,1835 5715,2250
  text "GND" at 5587,3633 h40
  text "LOW" at 5582,3438 h40
  text "CAN1" at 5677,3338 h50
  text "HI" at 5582,3243 h40
  text "Teensy on other side" at 5353.34,2935 h35 r90
  text "Teensy 4 CAN Tool, Rev 3, 7 Aug 2025 / J. Daily, Colorado State University" at 5195,2720 h35 r90
  text "HI" at 5572,2228 h40
  text "GND" at 4692,2143 h40
  text "CAN3" at 5687,2123 h50
  text "LOW" at 5592,2023 h40
  text "LOW" at 4787,2018 h40
  text "CAN2" at 4762,1928 h50
  text "GND" at 5682,1898 h40
  text "HI" at 4732,1823 h40
  text "Mount DSUB9 on this side" at 5620,1030 h40

## Text inside footprints (layer, text, board x,y; h text height)
BLU: Bottom Overlay "+" at 4625,3395 h40 r180; Bottom Overlay "-" at 4720,3390 h40 r180
CAN1: Top Overlay "Metz Connect" at 5726.61,3224.57 h31.5 r90; Top Overlay "ASP0250304" at 5570,3195 h55 r90
CAN2: Top Overlay "ASP0250304" at 4695,2310 h55 r270
CAN3: Top Overlay "Metz Connect" at 5735,1810 h31.5 r90; Top Overlay "ASP0250304" at 5575,1775 h55 r90
GRN: Bottom Overlay "+" at 4625,3645 h40 r180; Bottom Overlay "-" at 4720,3640 h40 r180
MB1: Bottom Overlay "INT" at 4815,2960 h100; Bottom Overlay "AN" at 5740,3105 h100; Bottom Overlay "SDO" at 5580,2655 h60; Bottom Overlay "SDI" at 5745,2555 h100; Bottom Overlay "5V" at 4815,2455 h100; Bottom Overlay "PWM" at 4750,3135 h80; Bottom Overlay "RX" at 4810,2760 h100; Bottom Overlay "RST" at 5765,2945 h100; Bottom Overlay "MikroBus" at 4620,3120 h120 r90; Bottom Overlay "TX" at 4825,2855 h100; Bottom Overlay "SDA" at 4825,2555 h80; Bottom Overlay "SCL" at 4820,2655 h80; Bottom Overlay "SCK" at 5580,2755 h60; Bottom Overlay "GND" at 5765,2350 h100; Bottom Overlay "CS" at 5740,2850 h100; Bottom Overlay "3V3" at 5765,2450 h100; Bottom Overlay "GND" at 4830,2355 h60
RED: Bottom Overlay "+" at 4625,1650 h40 r180; Bottom Overlay "-" at 4725,1645 h40 r180
U5: Top Overlay "33" at 5500,1395 h40; Top Overlay "12" at 4715,2405 h40; Top Overlay "32" at 4715,1400 h40; Top Overlay "Teensy 4.1" at 5338.33,2945 h40 r270; Bottom Overlay "32" at 4735,1440 h40 r180; Bottom Overlay "0" at 4775,3640 h40 r180; Bottom Overlay "24" at 4735,2240 h40 r180; Bottom Overlay "33" at 5475,1435 h40 r180
YEL: Bottom Overlay "-" at 5685,1640 h40 r180; Bottom Overlay "+" at 5585,1645 h40 r180